# Altium PCB PCB1.pcbdoc (part 2 of 3)
Units mil, origin at the board's own origin, x right, y up, seen from the top; angles counter-clockwise.
Board outline 4439.01 x 4693.87 mil, 2 copper layers (Top Layer, Bottom Layer); 119 components, 135 nets, 555 pads, 196 vias.
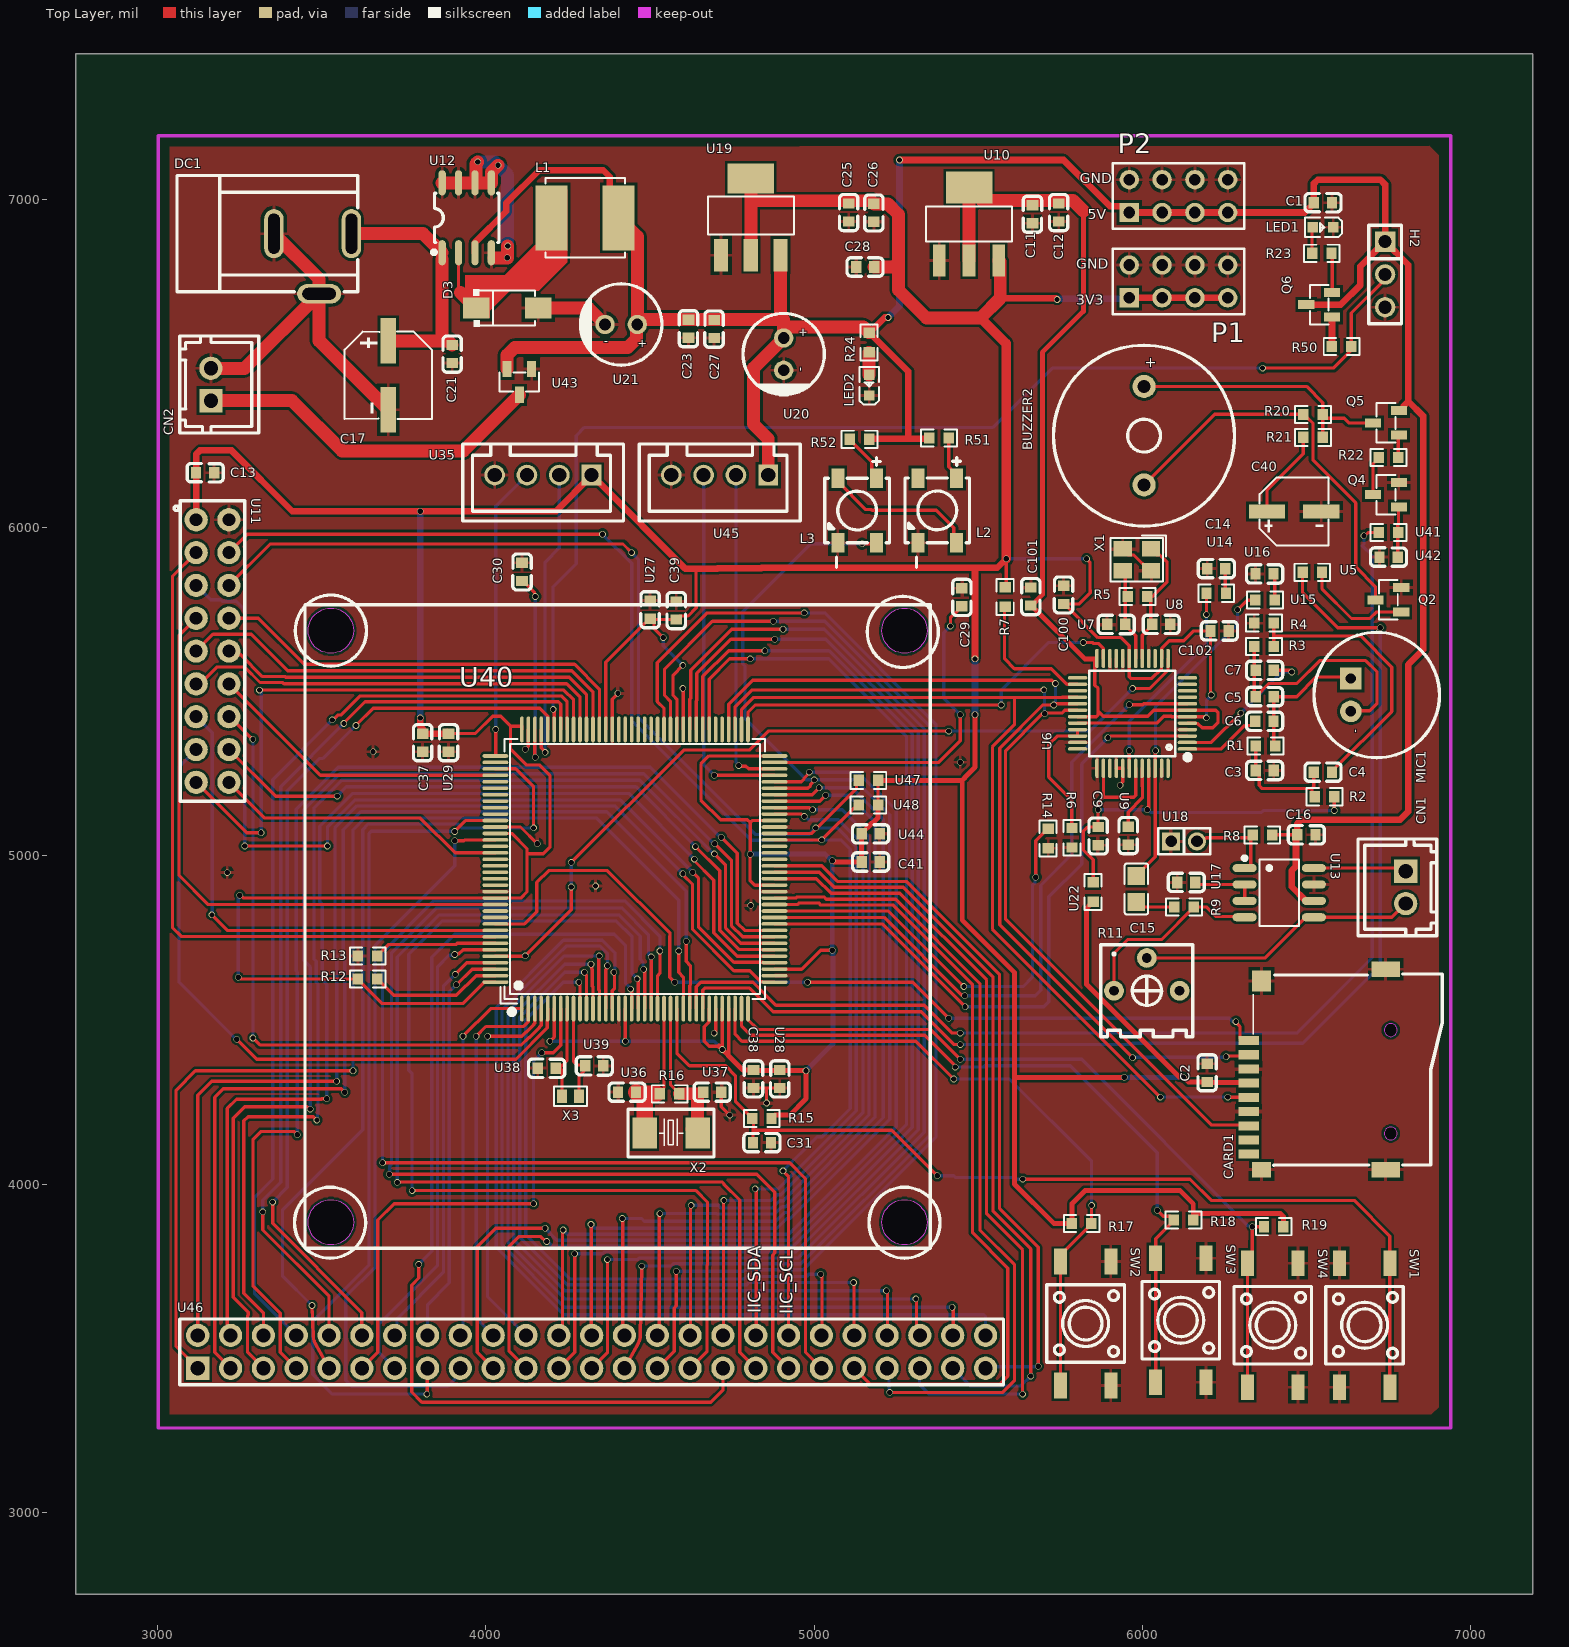
[diagram p0: Top Layer view]

## Via types
v1: diameter 20, hole 16, Top Layer to Bottom Layer, 196 vias

## Nets (pads, with @x,y where several pads share a name; then routed paths per layer and width w, separated by ;. In a path a pad name is that pad's centre, name@x,y a point inside that pad or via, vN(x,y) a via of type N, cw(c..) or ccw(c..) an arc to the next point about the centre after c; other vN are vias at no path point)
3V3: C2.2 C13.2 C25.2 C26.2 C28.2 C37.1 C38.1 C39.1 C41.1 C100.1 C102.1 CARD1.4 P1.1 P1.3 P1.5 P1.7 R7.2 R12.2 R15.2 R17.2 R18.2 R19.2 U6.6 U6.14 U6.19 U6.32 U10.3 U11.1 U19.2 U19.4 U22.1 U27.1 U28.1 U29.1 U35.1 U40.6 U40.17 U40.30 U40.32 U40.33 U40.39 U40.52 U40.62 U40.72 U40.84 U40.95 U40.108 U40.121 U40.131 U40.144 U44.1 U47.1 U48.1 | length 21300.3
  Top Layer w10: v1(3245,4630) 3247.71,4630 3252.71,4625 R12.2@3610,4625 3610,4623.87 3683.87,4550 3929.53,4550 3994.84,4615.31 U40.144@4028.7,4615.31 ; v1(3250,4880) 3252.71,4880 3261.49,4871.22 U40.131@4028.7,4871.22 4106.22,4871.22 4125,4890 4125,5006 ; U29.1@3882.05,5383.07 3882.05,5372.64 3967.64,5372.64 4020,5425 4045,5425 4075,5395 ; U40.121@4028.7,5068.07 4078.93,5068.07 4125,5022 4125,5006 ; U40.108@4109.41,5385 4109.41,5394.53 4108.94,5395 4075,5395 ; v1(4195,4435) 4207.84,4447.84 U40.6@4207.84,4534.6 ; U40.95@4365.32,5385 4365.32,5589.73 4498.03,5722.44 U27.1@4500,5722.44 4502.56,5719.88 U27.1@4511.76,5719.88 ; U40.17@4424.37,4534.6 4424.57,4534.4 4424.57,4435.43 v1(4425,4435) ; v1(4540,5665) 4511.76,5693.24 U27.1@4511.76,5719.88 ; U40.84@4581.85,5385 4581.85,5476.62 4570,5488.47 4570,5550 v1(4600,5580) ; 4640,5875 4640,5765 4640.86,5764.14 4640.86,5755.86 4615.63,5730.63 4590.75,5730.63 C39.1@4580,5719.88 U27.1@4511.76,5719.88 ; U40.30@4680.28,4534.6 4680.28,4500.46 4679.1,4499.29 4679.1,4493.07 4665,4478.97 4665,4435 4680,4420 4710,4420 ; U40.32@4719.65,4534.6 4719.65,4410.35 v1(4720,4410) ; U40.33@4739.33,4534.6 4739.33,4390.67 4740,4390 ; U40.39@4879.1,4654.68 4961.68,4654.68 5019.35,4712.35 v1(5055,4712.35) ; U40.52@4879.1,4910.59 4819.41,4910.59 4804.14,4925.86 4804.14,5004.14 v1(4805,5005) 4805,5101.58 ; U40.62@4879.1,5107.44 4810.86,5107.44 4805,5101.58 ; U40.72@4879.1,5304.29 4679.29,5304.29 4655,5280 4655,5170 4715,5110 4796.58,5110 4805,5101.58 ; U48.1@5194.66,5155 U47.1@5194.66,5230 ; R7.2@5582,5818.53 5585,5821.53 v1(5585,5905) ; C100.1@5760,5767.44 C100.1@5760.1,5767.44 ; U6.32@5802.49,5404.34 6044.34,5404.34 6065,5425 6088.39,5425 6089.36,5424.03 U6.6@6137.13,5424.03 v1@6188.26,5424.03 ; v1(5830,5905) 5840,5895 5840,5810 5840.86,5809.14 5840.86,5800.86 5807.44,5767.44 C100.1@5760.1,5767.44 ; v1(6210,5490) 6207.44,5492.56 C102.1@6207.44,5685 6155.85,5685 6125.85,5655 6081.77,5655 6058.51,5631.74 6058.51,5601.31 U6.14@6058.39,5601.19 6058.27,5601.07 6058.27,5570.64 6027.63,5540 5965.83,5540 5959.97,5545.86 U6.19@5959.97,5601.19 5959.97,5640.03 5935,5665 5864.43,5665 5772.74,5756.69 5770.84,5756.69 C100.1@5760.1,5767.44 ; 4075,5395 4075,5325 4123,5277 4163,5277 4195,5245 4195,5026 4175,5006 4125,5006
  Top Layer w15: 4710,4420 v1@4719.65,4410.35 ; v1(4720,4410) 4739.33,4390.67 ; 4740,4390 4782.44,4347.56 C38.1@4815,4347.56 4816.6,4345.96 4974.04,4345.96 v1(4975,4345) 4975,4260 4925,4210 4880,4210 4879.51,4209.51 4878.38,4209.51 4870,4201.13 R15.2@4870,4200 ; v1(5055,4985) 5056.35,4985 5060.31,4981.04 C41.1@5144.77,4981.04 U44.1@5144.77,5066.85 5144.77,5068.82 5176.02,5100.07 5177.99,5100.07 5194.66,5116.73 U48.1@5194.66,5155 ; U47.1@5194.66,5230 5451.21,5230 ; v1(5490,5430) 5490,5270 5460,5240 5460,5238.79 5451.21,5230 ; 5490,5875 5492.44,5877.44 ; U22.1@5850,4860.34 5848.87,4860.34 5840.49,4851.96 5840.49,4850.83 5830,4840.34 5830,4607.98 6112.02,4325.96 6124.04,4325.96 v1(6125,4325) 6126.35,4325 6140.24,4311.12 C2.2@6197,4311.12 6198.88,4309.24 6321.66,4309.24 CARD1.4@6323.54,4307.36 ; v1(5945,4325) 5612.5,4325 5610,4322.5 ; R18.2@6155,3890 6155,3910 ; R19.2@6429.66,3870 6429.66,3901.21 6420.87,3910 6155,3910 ; 5451.21,5230 5451.21,4803.79 5610,4645 5610,4322.5 ; 5610,4322.5 5610,4000 5730,3880 R17.2@5785.34,3880 5785.34,3940.34 5825,3980 6115,3980 6155,3940 6155,3910
  Top Layer w20: U11.1@3117,6023.87 3117,6223.28 3128.72,6235 3225,6235 3410,6050 v1(3800,6050) 4213.35,6050 U35.1@4321.85,6158.5 ; v1(3800,5420) 3800,5394.1 3822.05,5372.05 U29.1@3885.91,5372.05 ; U35.1@4321.85,6160 U35.1@4321.85,6158.5 ; v1(5490,5600) 5490,5875 ; 5567,6698.87 5736.13,6698.87 v1(5740,6695) ; v1(5585,5905) 5557.44,5877.44 5492.44,5877.44 4840,5877.44 4838.78,5876.22 4706.22,5876.22 4705,5875 4640,5875 4606.85,5875 4343.35,6138.5 4341.85,6138.5 U35.1@4321.85,6158.5 ; P1.1@5957,6697 P1.1@5960,6700 P1.3@6060,6700 P1.5@6160,6700 P1.7@6260,6700
  Top Layer w30: 5507,6638.87 5585,6560.87 v1(5585,5905)
  Top Layer w39.37: U19.2@4807,6829.85 4807,6995.82 ; U19.4@4807,7063.71 4807,6995.82 ; C28.2@5182.79,6793.87 5242,6793.87 5247,6798.87 ; U10.3@5562.41,6813.37 5567,6808.79 5567,6698.87 5507,6638.87 5342,6638.87 5257.11,6723.77 5257.11,6953.77 5224.44,6986.43 C26.2@5182,6986.43 5172.61,6995.82 4807,6995.82
  Bottom Layer w10: v1(3245,4630) 3245,4872.29 3250,4877.29 v1(3250,4880) ; v1(4195,4435) v1(4425,4435) 4695,4435 v1(4720,4410) ; v1(4540,5665) 4540,5640 v1(4600,5580) ; v1(5585,5905) v1(5830,5905) ; v1(6195,5420) 6195,5472.29 6210,5487.29 v1(6210,5490)
  Bottom Layer w15: v1(4805,5005) 5033.65,5005 5053.65,4985 v1(5055,4985) ; v1(4975,4345) 5057,4427 5057,4710.35 v1(5055,4712.35) v1@5055,4983.65 ; v1(5945,4325) v1(6125,4325)
  Bottom Layer w20: v1(3800,5420) v1(3800,6050) ; v1(5490,5430) v1(5490,5600) ; v1(5740,6695) 5742,6697 P1.1@5960,6697
+5V: C1.2 C16.1 C23.2 C27.2 H2.1 L1.2 P2.1 P2.3 P2.5 P2.7 Q5.2 Q6.3 R8.2 R24.2 R51.2 R52.2 U12.3 U13.6 U19.3 U20.1 U21.1 U43.2 U45.1 | length 8821.1
  Top Layer w10: R8.2@6394.96,5063.87 C16.1@6472.04,5063.87
  Top Layer w19.68: U12.3@3966.53,6837.37 3966.53,6868.4 4062,6963.87 4062,6988.87 4162,7088.87 4357,7088.87 4377,7068.87 4377,6971.13 L1.2@4404.48,6943.65
  Top Layer w20: R24.2@5167.55,6593.53 R24.2@5168.68,6593.53 ; R52.2@5167.66,6269 5169.66,6271 5286,6271 ; v1(5225,6640) 5215.14,6640 R24.2@5168.68,6593.53 ; v1(5260,7120) 5760,7120 5900.47,6979.53 5940.47,6979.53 P2.1@5960,6960 P2.3@6060,6960 P2.5@6160,6960 P2.7@6260,6960 6494.41,6960 6522.44,6988.03 C1.2@6522.44,6990 6522.44,7048.28 6534.16,7060 6725,7060 6739.43,7045.57 H2.1@6739.43,6871.32 ; R51.2@5350.34,6273 5348.34,6271 5286,6271 ; Q6.3@6499.3,6679.41 6604.48,6679.41 6664.27,6739.19 6664.27,6796.16 H2.1@6739.43,6871.32 ; U13.6@6522.61,4862.68 6498.3,4862.68 6455,4905.98 6455,4955 6467.9,4967.9 6467.9,5059.73 C16.1@6472.04,5063.87 6472.04,5098.28 6483.75,5110 6785,5110 6810,5135 6810,5582.5 6855,5627.5 6855,6339.98 6810,6384.98 ; Q5.2@6781.3,6356.27 6792.12,6356.27 6795.9,6360.05 6795.9,6370.88 6810,6384.98 ; R24.2@5168.68,6593.53 5286,6476.21 5286,6271 ; H2.1@6739.43,6871.32 6810,6800.75 6810,6384.98
  Top Layer w39.37: U43.2@4064.6,6483.24 4064.6,6525.81 4087.66,6548.87 4432,6548.87 4458.34,6575.21 4458.34,6616 4476.05,6633.72 C23.2@4617,6633.72 4897.55,6633.72 ; L1.2@4404.48,6943.65 4461.21,6886.92 U21.1@4461.21,6633.72 ; U45.1@4860,6160 4860,6270 4815,6315 4815,6485.78 U20.1@4907,6577.78 4907,6611.3 ; U19.3@4897.55,6829.85 4897.55,6633.72 ; R24.2@5167.55,6593.53 5149.78,6611.3 4907,6611.3 ; 4897.55,6633.72 4907,6633.72 4907,6611.3
  Bottom Layer w20: v1(5225,6640) 5260,6675 v1(5260,7120)
AVDD: C9.1 R2.2 U6.38 U6.43 U6.45 U22.2 | length 1482.6
  Top Layer w10: U22.2@5850,4919.66 5850,4987.77 5820,5017.77 5820,5075 5832.56,5087.56 C9.1@5865,5087.56 v1(5865,5140) 5865,5162.12 5881.23,5178.36 ; U6.38@5881.23,5266.55 5881.23,5178.36 ; U6.43@5979.65,5266.55 5979.65,5184.21 5973.79,5178.36 5881.23,5178.36 ; v1(6015,5140) 6015,5142.71 6019.02,5146.73 U6.45@6019.02,5266.55 ; v1(6584.66,5138) R2.2@6584.66,5180
  Bottom Layer w10: v1(5865,5140) 6017.71,5140 6025.71,5132 6362.21,5132 6368.21,5138 v1(6584.66,5138)
B_SWITCH: U40.28 U41.2 | length 3639.6
  Top Layer w10: U40.28@4640.91,4534.6 4640.91,4600.91 4655,4615 4813.61,4615 4883.61,4545 5335,4545 5420,4460 v1(5445,4460) ; v1(6675,5975) 6677.71,5975 6687.71,5985 U41.2@6720.34,5985
  Bottom Layer w10: v1(5445,4460) 6469.84,4460 6700,4690.16 6700,5915 6670,5945 6675,5950 v1(6675,5975)
B_WPS: U5.2 U40.29 | length 3666.1
  Top Layer w10: U40.29@4660.59,4534.6 4660.59,4590.59 4667,4597 4803,4597 4875,4525 5326.72,4525 5426.72,4425 v1(5445,4425) ; U5.2@6487.96,5863.87 6487.96,5802.04 6595,5695 v1(6725,5695)
  Bottom Layer w10: v1(5445,4425) 5966.02,4425 5970.02,4429 6488.34,4429 6725,4665.66 v1@6725,5694.56
CVDD: C11.2 C12.2 C101.1 U6.5 U6.7 U6.24 U6.31 U10.2 U10.4 | length 2889.7
  Top Layer w10: U6.31@5802.49,5424.03 5859.03,5424.03 5865,5430 5865,5440 ; 5855,5600 5855,5520 5865,5510 5865,5440 ; U6.5@6137.13,5404.34 6161.52,5404.34 6162.88,5402.98 6168.93,5402.98 6181.91,5390 6215,5390 6230,5405 6230,5437.86 6224.14,5443.71 U6.7@6137.13,5443.71 6034.97,5443.71 6016.25,5425 5880,5425 5865,5440
  Top Layer w15: C101.1@5660,5762.44 C101.1@5661.97,5762.44 ; 5820,6965 5820,6658.94 5695,6533.94 5695,5795.47 C101.1@5661.97,5762.44 ; 5855,5600 5824.41,5600 C101.1@5661.97,5762.44
  Top Layer w39.37: U10.2@5471.86,6813.37 U10.4@5471.86,7036.59 5511.41,6997.04 5665,6997.04 5745,6997.04 5787.96,6997.04 5820,6965
DCMI_D0: U11.8 U40.96 | length 1341
  Top Layer w10: U11.8@3217,5723.87 3306.13,5723.87 3446.45,5583.55 4269.96,5583.55 4345.63,5507.88 U40.96@4345.63,5385
DCMI_D1: U11.9 U40.97 | length 1417.5
  Top Layer w10: U11.9@3117,5623.87 3168.13,5675 3285,5675 3396.13,5563.87 4261.81,5563.87 4325.95,5499.73 U40.97@4325.95,5385
DCMI_D2: U11.10 U40.98 | length 1250.6
  Top Layer w10: U11.10@3217,5623.87 3228.65,5612.23 3252.77,5612.23 3319,5546 3388.54,5546 3390.37,5544.18 4253.65,5544.18 4306.26,5491.57 U40.98@4306.26,5385
DCMI_D3: U11.11 U40.99 | length 1327.1
  Top Layer w10: U11.11@3117,5523.87 3128.87,5523.87 3180,5575 3264.54,5575 3311.54,5528 3381.09,5528 3384.59,5524.5 4245.5,5524.5 4286.58,5483.42 U40.99@4286.58,5385